# Altium PCB urbanturbine_rev5a.PcbDoc
Units mil, origin at the board's own origin, x right, y up, seen from the top; angles counter-clockwise.
Board outline 3150 x 4000 mil, 2 copper layers (Top Layer, Bottom Layer); 55 components, 50 nets, 221 pads, 17 vias.
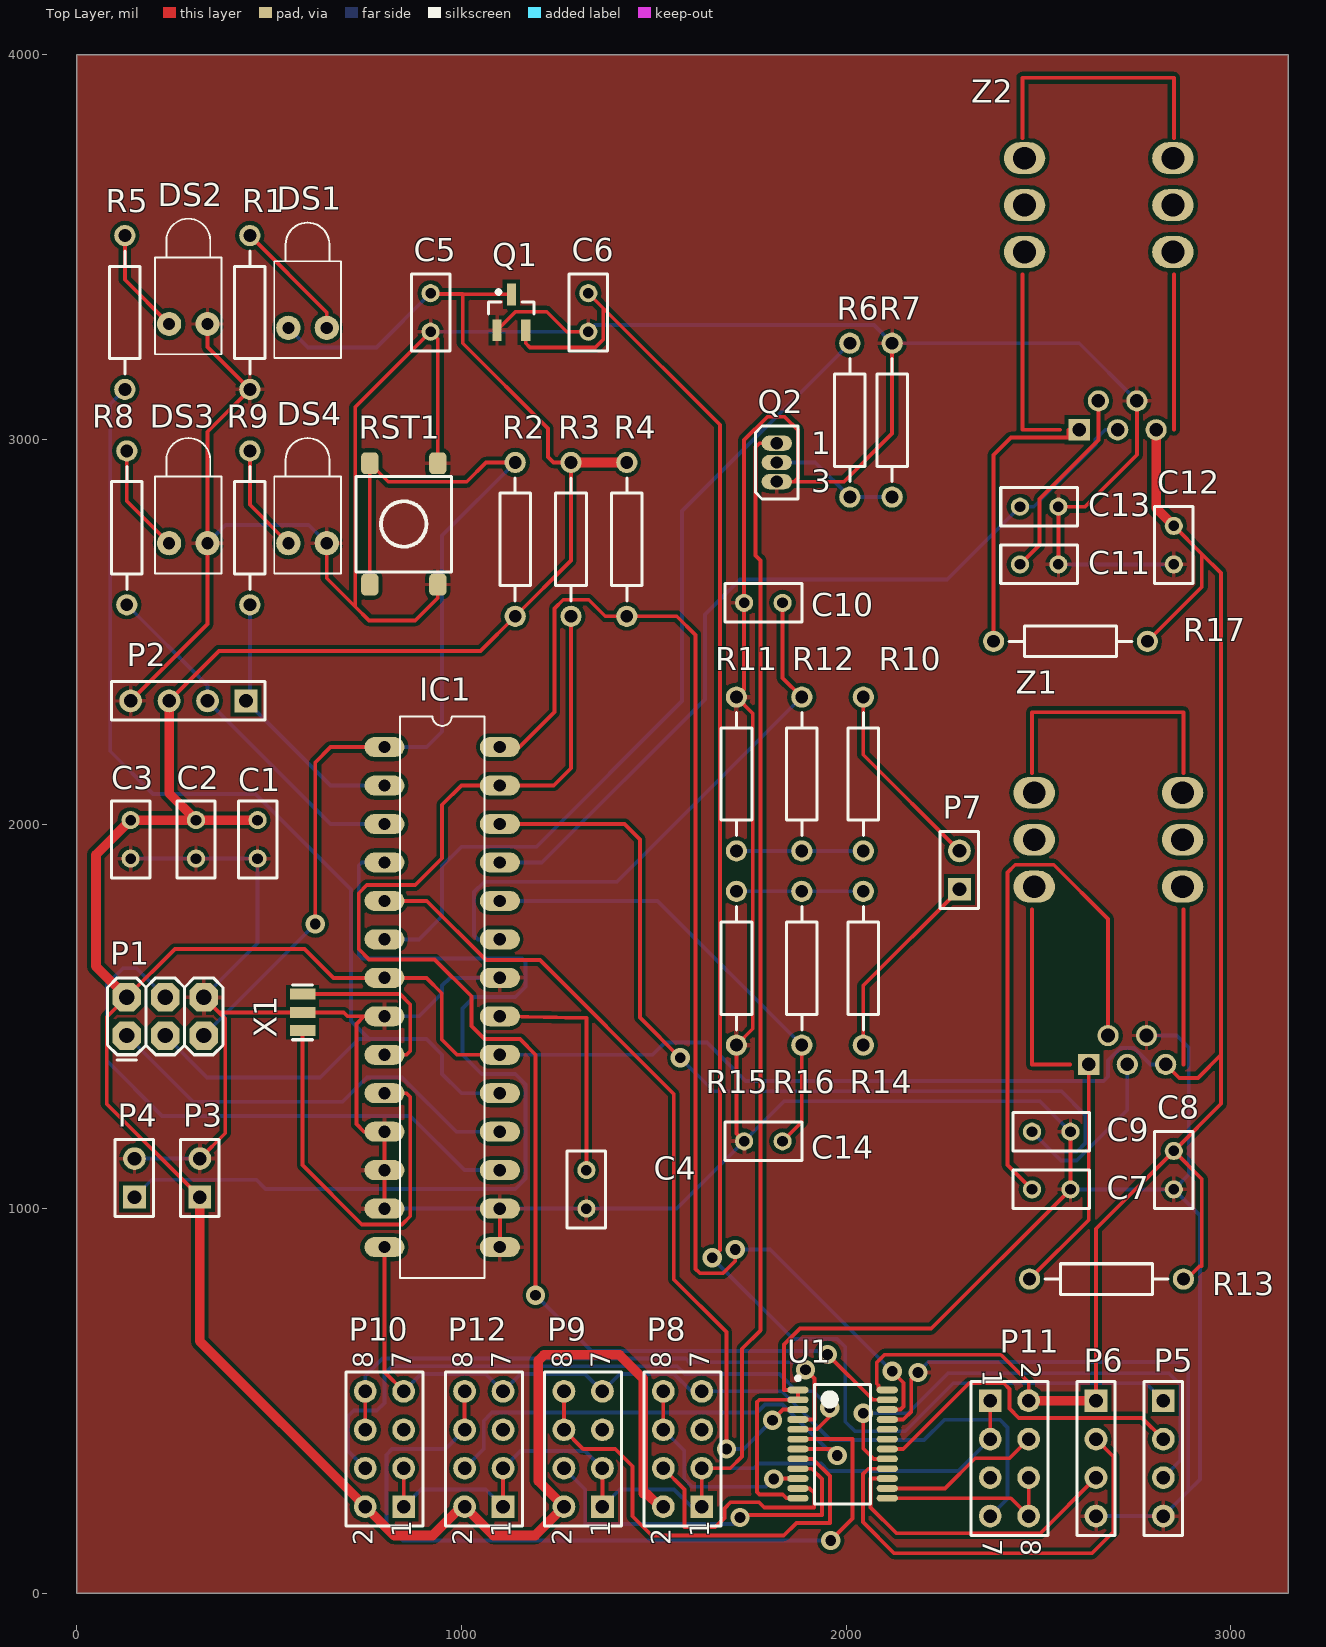
[diagram p0: Top Layer view]
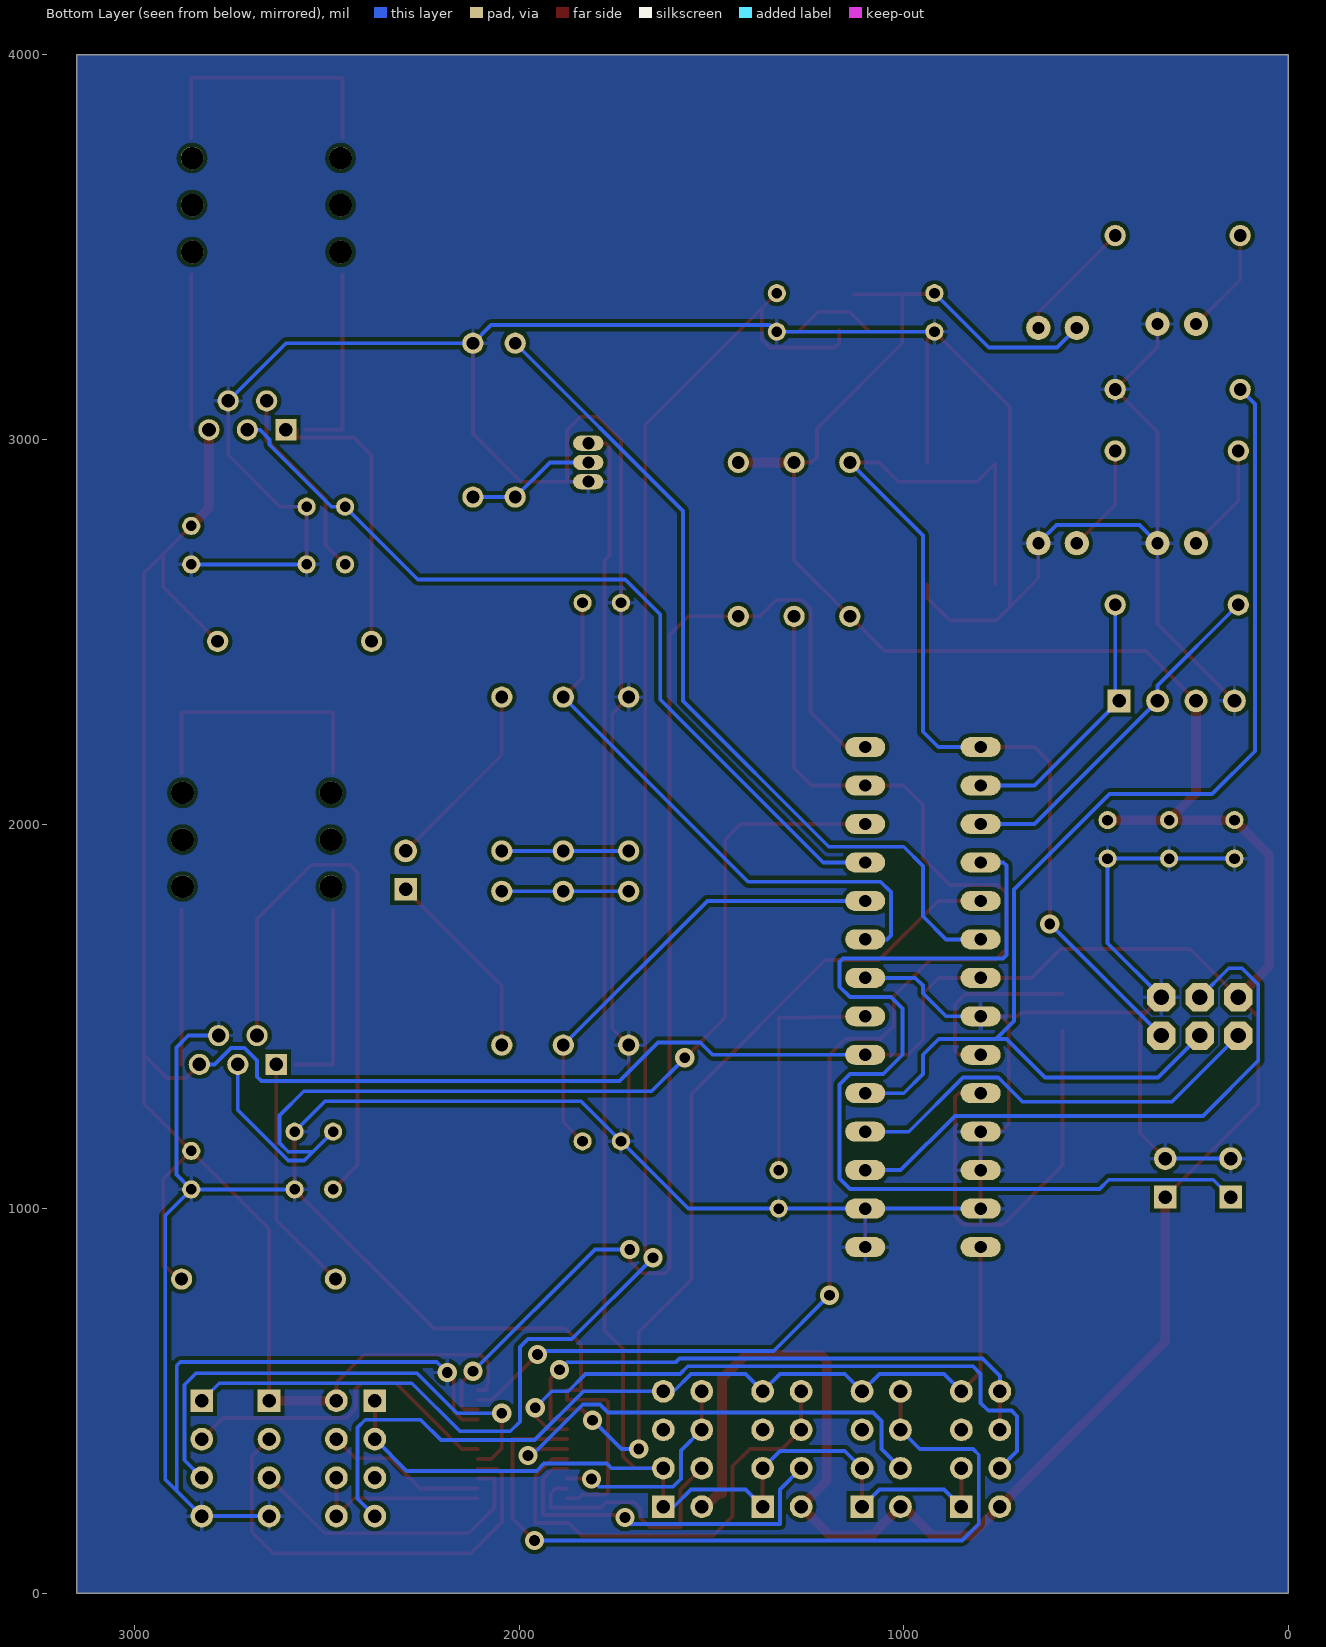
[diagram p1: Bottom Layer view, seen from below]

## Layer stack, top to bottom
Top Solder: solder mask 0.4, Solder Resist, Dk 3.5
Top Layer: signal copper 1.4
Dielectric 1: dielectric 12.6, FR-4, Dk 4.8
Bottom Layer: signal copper 1.4
Bottom Solder: solder mask 0.4, Solder Resist, Dk 3.5

## Board outline
0,0 0,4000 3150,4000 3150,0

## Design rules (kind name [scope] priority, off if disabled: settings)
Clearance [All] p1: gap=10 except(1: SMDPad-SMDPad)
PolygonConnect [All] p1: connectstyle=Relief reliefconductorwidth=10 reliefentries=4 polygonreliefangle="90 Angle" airgapwidth=10
RoutingVias [All] p1: holewidth=28 width=50 viastyle="Through Hole" minholewidth=28 minwidth=50 maxholewidth=28 maxwidth=50
SolderMaskExpansion [All] p1: expansion=4
Width [All] p1: maxlimit=25 minlimit=10 preferedwidth=10 minimp=50.000000 maximp=50.000000 favimp=50.000000
30 further rules are at their usual default settings.

## Classes and differential pairs
component class displays: P8 P9 P10 P11 P12
component class sensors: C7 C8 C9 C10 C11 C12 C13 C14 P7 R10 R11 R12 R13 R14 R15 R16 R17 Z1 Z2
component class urbanturbine: C1 C2 C3 C4 C5 C6 DS1 DS2 DS3 DS4 IC1 P1 P2 P3 P4 P5 P6 Q1 Q2 R1 R2 R3 R4 R5 R6 R7 R8 R9 RST1 U1 X1

## Components (designator, comment, footprint, x,y, rotation, side; value= is the part's Value field where it differs from the comment)
C1 "Cap Pol1" RAD-0.1 470,1960 r270 top
C2 "Cap Pol1" RAD-0.1 310,1960 r270 top
C3 "Cap Pol1" RAD-0.1 140,1960 r270 top
C4 "C1005X7R1H104K050BB" RAD-0.1 1325,1050 r270 top
C5 "Cap" RAD-0.1 920,3330 r90 top
C6 "Cap" RAD-0.1 1330,3330 r90 top
C7 "Cap" RAD-0.1 2533.66,1050 r0 top
C8 "Cap" RAD-0.1 2852.36,1100 r90 top
C9 "Cap" RAD-0.1 2533.66,1200 r0 top
C10 "Cap" RAD-0.1 1785,2575 r0 top
C11 "Cap" RAD-0.1 2502.36,2675 r0 top
C12 "Cap" RAD-0.1 2852.36,2725 r90 top
C13 "Cap" RAD-0.1 2502.36,2825 r0 top
C14 "Cap" RAD-0.1 1785,1175 r0 top
DS1 "LTST-C191KGKT" LED-1 600,3290 r90 top
DS2 "LTST-C191KRKT" LED-1 290,3300 r90 top
DS3 "LTST-C191KRKT" LED-1 290,2730 r90 top
DS4 "LTST-C191KRKT" LED-1 600,2730 r90 top
IC1 "ATMEGA328-PU" *DIL28 950,1550 r0 top
P1 "M20-9980346" 2X3 130,1450 r0 top
P2 "Header 4" HDR1X4 440,2320 r180 top
P3 "" HDR1X2 320,1030 r90 top
P4 "" HDR1X2 150,1030 r90 top
P5 "" HDR1X4 2825,500.59 r270 top
P6 "" HDR1X4 2650,500.59 r270 top
P7 "" HDR1X2 2295,1830 r90 top
P8 "" HDR2X4 1625,225 r90 top
P9 "SPEED_DISP" HDR2X4 1366.67,225 r90 top
P10 "TEMP_DISP" HDR2X4 850,225 r90 top
P11 "CRANK_DISP" HDR2X4 2375,500.59 r270 top
P12 "HUMIDITY_DISP" HDR2X4 1108.33,225 r90 top
Q1 "AP2138N-3.3TRG1" SOT23_M 1130,3330 r90 top
Q2 "MOSFET-N" E3 1820,2940 r0 top
R1 "RC0603JR-071KL" AXIAL-0.4 450,3330 r270 top
R2 "Res1" AXIAL-0.4 1140,2740 r90 top
R3 "Res2" AXIAL-0.4 1285,2740 r90 top
R4 "Res2" AXIAL-0.4 1430,2740 r90 top
R5 "Res1" AXIAL-0.4 125,3330 r90 top
R6 "ERJ-3EKF1002V" AXIAL-0.4 2010,3050 r90 top
R7 "Res2" AXIAL-0.4 2120,3050 r90 top
R8 "Res1" AXIAL-0.4 130,2770 r90 top
R9 "Res1" AXIAL-0.4 450,2770 r90 top
R10 "Res2" AXIAL-0.4 2045,2130 r90 top
R11 "Res2" AXIAL-0.4 1715,2130 r90 top
R12 "Res2" AXIAL-0.4 1885,2130 r270 top
R13 "Res2" AXIAL-0.4 2677.36,816.61 r0 top
R14 "Res2" AXIAL-0.4 2045,1625 r270 top
R15 "Res2" AXIAL-0.4 1715,1625 r270 top
R16 "Res2" AXIAL-0.4 1885,1625 r90 top
R17 "Res2" AXIAL-0.4 2583.66,2475 r0 top
RST1 "PTS645SH50SMTR92 LFS" "TACTILE SWITCH SMD" 850,2780 r90 top
U1 "TCA9548A" TCA9548A 1991.14,387.8 r0 top
X1 "16MHz" RESONATOR-SMD 587.49,1510.38 r90 top
Z1 "LEM HO-25P" HO-25 2582.09,1375 r90 top
Z2 "LEM HO-6P" HO-25 2557.09,3025 r90 top

## Footprints (in the part's own frame and the unit in brackets; to place one, negate y for a bottom-side part, rotate by r counter-clockwise, add the part's x,y. Pads: shape width x height; smd on the part's side, far side on the other; paste and mask are expansions set on the pad)
2X3 [mil] "2X3"
  oct 74x74 hole 40: 1(0,0) 2(0,100) 3(100,0) 4(100,100) 5(200,0) 6(200,100)
  silkscreen extent -50,-63 250,150, body extent -50,-49 250,149, height 335
*DIL28 [mil]
  oval 104x52 hole 32: 1(-150,650) 2(-150,550) 3(-150,450) 4(-150,350) 5(-150,250) 6(-150,150) 7(-150,50) 8(-150,-50) 9(-150,-150) 10(-150,-250) 11(-150,-350) 12(-150,-450) 13(-150,-550) 14(-150,-650) 15(150,-650) 16(150,-550) 17(150,-450) 18(150,-350) 19(150,-250) 20(150,-150) 21(150,-50) 22(150,50) 23(150,150) 24(150,250) 25(150,350) 26(150,450) 27(150,550) 28(150,650)
  silkscreen extent -110,-730 110,730, body extent -315,-730 110,730, height 314
AXIAL-0.4 [mm] "Axial Device, Thru-Hole; 2 Leads; 0.4 in Pin Spacing"
  round 1.4 hole 0.85: 1(-5.08,0) 2(5.08,0)
  silkscreen extent -4.06,-1.02 4.06,1.02
E3 [mm] "TO, Flat Index; 3 In-Line, Axial Leads; Body Dia. 4.6mm; Lead Dia. 0.5 mm (max)"
  oval 2x1 hole 0.8: 1(0,1.27) 2(0,0) 3(0,-1.27)
  silkscreen extent -1.41,-2.41 1.41,2.41
HDR1X2 [mm] "Connector; Header; 2 Position"
  rect 1.5x1.5 hole 0.9: 1(0,0)
  round 1.5 hole 0.9: 2(2.54,0)
  silkscreen extent -1.27,-1.27 3.81,1.27
HDR1X4 [mm] "Connector; Header; 4 Position"
  rect 1.5x1.5 hole 0.9: 1(0,0)
  round 1.5 hole 0.9: 2(2.54,0) 3(5.08,0) 4(7.62,0)
  silkscreen extent -1.27,-1.27 8.89,1.27
HDR2X4 [mm] "Connector; Header; 4x2 Position"
  rect 1.5x1.5 hole 0.9: 1(0,0)
  round 1.5 hole 0.9: 2(0,2.54) 3(2.54,0) 4(2.54,2.54) 5(5.08,0) 6(5.08,2.54) 7(7.62,0) 8(7.62,2.54)
  silkscreen extent -1.27,-1.27 8.89,3.81
HO-25 [mm]
  round 1.4 / inner oval 2.5x1.4 / far side round 1.4 hole 0.9: 1(0,-6.33) 2(1.905,-5.06) 3(0,-3.79) 4(1.905,-2.52)
  rect 1.4x1.4 / inner rect 2.5x1.4 / far side rect 1.4x1.4 hole 0.9: 5(0,-1.25)
  oval 2.1x2.74 / inner round 1.5 / far side round 1.5 hole 1.5: ""(11.74,-7.44) ""(11.74,2.36) ""(14.84,-7.44) ""(14.84,2.36) ""(17.94,-7.44) ""(17.94,2.36)
  Top Layer lines w0.254: 10.25,2.5 0,2.5 0,0 ; 19.25,2.5 23.25,2.5 23.25,-7.5 19.25,-7.5 ; 0,-7.5 10.25,-7.5
  body extent -0.22,-8.5 23.72,3.5, height 20.8
LED-1 [mm] "LED; 2 Leads"
  round 1.6 hole 0.8: 1(0,1.27) 2(0,-1.27)
  silkscreen extent -2,-2.2 6.95,2.2
RAD-0.1 [mm] "Radial Cap, Thru-Hole; 2 Leads; 0.1 in Pin Spacing"
  round 1.2 hole 0.7: 1(-1.27,0) 2(1.27,0)
  silkscreen extent -2.54,-1.27 2.54,1.27
RESONATOR-SMD [mil] "RESONATOR-SMD"
  rect 28x67 smd: 1(-47.62,0) 2(-0.38,0) 3(47.62,0)
  silkscreen extent -71,-26 71,26
SOT23_M [mm] "SOT23, 3-Leads, Body 2.9x1.3mm, Pitch 0.95mm, Lead Span 2.3mm - Reverse Pinning, IPC Low Density"
  rect 1.45x0.6 smd: 1(1.175,0) 2(-1.175,-0.95) 3(-1.175,0.95)
  silkscreen extent -0.1,-1.5 1.47,1.5, body extent -0.7,-1.5 0.7,1.5, height 1.1
"TACTILE SWITCH SMD" [mil] "Switch, Through-Hole, 4 Leads, Body 8.5x8.5mm, Row Spacing 9.0mm, Pitch 4.5mm"
  rrect50% 57x45 smd: 1(157.87,-88.58) 2(-157.48,-88.58) 3(157.87,88.19) 4(-157.48,88.19)
  silkscreen extent -124,-124 124,124, body extent -177,-122 177,122, height 177
TCA9548A [mm] "TSOP, 24-Leads, Body 7.80x4.40mm, Pitch 0.65mm, IPC Medium Density"
  oval 1.4x0.45 smd: 1(-2.95,3.575) 2(-2.95,2.925) 3(-2.95,2.275) 4(-2.95,1.625) 5(-2.95,0.975) 6(-2.95,0.325) 7(-2.95,-0.325) 8(-2.95,-0.975) 9(-2.95,-1.625) 10(-2.95,-2.275) 11(-2.95,-2.925) 12(-2.95,-3.575) 13(2.95,-3.575) 14(2.95,-2.925) 15(2.95,-2.275) 16(2.95,-1.625) 17(2.95,-0.975) 18(2.95,-0.325) 19(2.95,0.325) 20(2.95,0.975) 21(2.95,1.625) 22(2.95,2.275) 23(2.95,2.925) 24(2.95,3.575)
  silkscreen extent -3.07,-3.95 1.85,4.47, body extent -3.27,-3.96 3.28,3.93, height 1.2

## Part data
C1 C2 C3 C4: library part Cap, "Capacitor"
C5 C6 C7 C8 C9 C10 C11 C12 C13 C14: "Capacitor"
DS1 DS2 DS3 DS4: library part LED1, "Typical RED GaAs LED"
IC1: "IC MCU 8BIT 32KB FLASH 28DIP"
P1: "DIL VERTICAL PC TAIL PIN HEADER"
P2: "Header, 4-Pin"
P3 P4 P7: library part "Header 2", "Header, 2-Pin"
P5 P6: library part "Header 4", "Header, 4-Pin"
P8 P9 P10 P11 P12: library part "Header 4X2", "Header, 4-Pin, Dual row"
Q1: "IC REG LINEAR 3.3V 250MA SOT23-3"
Q2: "N-Channel MOSFET"
R1 R2 R5 R6 R8 R9: library part Res2, "Resistor"
R3 R4 R7 R10 R11 R12 R13 R14 R15 R16 R17: "Resistor"
RST1: "SWITCH TACTILE SPST-NO 0.05A 12V"
U1: "IIC multiplexor"
X1: library part CSTNE16M0VH3C000R0, "CER RESONATOR 16MHZ SMD"
Z1: "Hall Effect Current Sensor"
Z2: library part "LEM HO-25P", "Hall Effect Current Sensor"

## Via types
v1: diameter 50, hole 28, Top Layer to Bottom Layer, 17 vias

## Nets (pads, with @x,y where several pads share a name; then routed paths per layer and width w, separated by ;. In a path a pad name is that pad's centre, name@x,y a point inside that pad or via, vN(x,y) a via of type N, cw(c..) or ccw(c..) an arc to the next point about the centre after c; other vN are vias at no path point)
3.3V: C6.2 P5.1 Q1.2 | length 4531.6
  Top Layer w10: Q1.2 1167.4,3250 1178.4,3239 1348,3239 1369,3260 1369,3341 ; C6.2 1369,3341 ; v1(1652,872) 1672,892 1672,3038 1369,3341
  Bottom Layer w10: v1(1652,872) 1863,661 1977,661 1998,640 1998,446 2023,421 2154,421 2279,546 2779.59,546 P5.1
+5: C1.1 C2.1 C3.1 C5.2 C8.2 C12.2 DS1.1 IC1.7 IC1.20 P1.2 P2.3 P3.1 P6.1 P8.2 P9.2 P10.2 P11.2 P12.2 Q1.1 R2.1 R3.2 R4.2 R13.2 R17.2 U1.24 Z1.1 Z2.1 | length 14804
  Top Layer w10: P2.3 370,2450 1050,2450 R2.1 1285,2685 R3.2 1239.64,2940 1225,2954.64 1225,3028.58 1003.58,3250 1003.58,3378.13 ; P3.1 78,1272 78,1498 P1.2 255,1675 592.5,1675 667.5,1600 IC1.7 909,1600 949,1560 949,1440 989,1400 IC1.20 ; C5.2 921.87,3378.13 1003.58,3378.13 ; Q1.1 1130,3377.44 1061.02,3377.44 1003.58,3378.13 ; U1.24 2084.73,528.54 2084.73,539.94 2080,544.67 2080,599.9 2100,619.9 2403.1,619.9 2475,548 P11.2 ; P6.1 2650,947.64 C8.2 ; R17.2 2925,2616.34 2925,2702.36 ; Z1.1 2866.3,1340 2915,1340 2975,1400 ; C12.2 2925,2702.36 ; R13.2 2877.36,808.46 2918.9,850 2925,850 2925,1077.36 C8.2 ; C8.2 2975,1272.64 2975,1400 ; 2925,2702.36 2975,2652.36 2975,1400
  Top Layer w25: P1.2 50,1630 50,1920 C3.1 C2.1 ; P2.3 240,2080 C2.1 ; P3.1 320,655 P10.2 825,150 925,150 1000,225 P12.2 1083.33,150 1191.67,150 P9.2 1200,291.67 1200,605.26 1214.64,619.9 1411.1,619.9 1472.5,558.5 1472.5,259.12 1481.66,259.12 1515.78,225 P8.2 ; C1.1 C2.1 ; R3.2 R4.2 ; P11.2 P6.1 ; Z2.1 2806.3,2821.06 C12.2
  Bottom Layer w10: DS1.1 601,3239 779,3239 C5.2 ; IC1.20 1496.88,1400 1529,1432.12 1638.69,1432.12 1738.81,1332 2670,1332 2681,1343 2681,1384.89 2713.67,1417.56 2748.93,1417.56 2791.49,1375 Z1.1
BME_C: P6.2 U1.16 | length 1161.6
  Top Layer w10: U1.16 2057.82,323.82 2044,310 2044,185 2125,104 2640,104 2695,159 2695,355.59 P6.2
BME_D: P6.3 U1.15 | length 792.2
  Top Layer w10: U1.15 2064,298.23 2064,223 2131,156 2505.41,156 P6.3
COMP_IN: IC1.4 P4.1 | length 2614
  Bottom Layer w10: P4.1 195,1075 467,1075 491,1051 1140,1051 1167,1078 1167,1323 1140,1350 1053,1350 1003,1400 1003,1520 1033,1550 1140,1550 1167,1577 1167,1641 1158,1650 742,1650 733,1659 733,1892 741,1900 IC1.4
CRANK_C: P11.4 U1.14 | length 420.7
  Top Layer w10: U1.14 2257.64,272.64 2336,351 2425.41,351 P11.4
CRANK_CURRENT: C13.1 IC1.25 Z2.3 | length 2210
  Bottom Layer w10: IC1.25 1209,1900 1633,2324 1633,2545 1724,2636 2263.36,2636 C13.1 2488,2825 2649,2986 2649,3000 2674,3025 Z2.3
CRANK_D: P11.6 P11.8 U1.13 | length 487
  Top Layer w10: U1.13 2428.54,247.05 P11.8 P11.6
CRANK_IN_+: P7.2 R10.2 | length 503.6
  Top Layer w10: R10.2 2045,2180 P7.2
CRANK_VOLTAGE: C10.2 IC1.23 R12.1 | length 1511.9
  Top Layer w10: C10.2 1835,2380 R12.1
  Bottom Layer w10: IC1.23 1043,1700 1033,1710 1033,1823 1060,1850 1405,1850 R12.1
DISPLAY_GND: P8.1 P8.3 P9.1 P9.3 P10.1 P10.3 P11.1 P11.3 P12.1 P12.3 Q2.1 | length 5009.7
  Top Layer w10: P10.1 P10.3 ; P12.1 P12.3 ; P9.1 P9.3 ; P8.1 P8.3 1698.91,325 1729.53,355.62 1729.53,635.53 1777.56,683.56 1777.56,2685.44 1765,2698 1765,2980 1775,2990 Q2.1 ; P11.3 P11.1
  Bottom Layer w10: P10.1 895,270 1063.33,270 P12.1 ; P12.3 1153.33,370 1321.67,370 P9.3 ; P9.1 1411.67,270 1553,270 1598,225 P8.1 ; P8.3 1760,325 1772,337 1935,337 1954,318 2292.41,318 P11.3
DISPLAY_RES: IC1.14 P8.7 P9.7 P10.7 P11.7 P12.7 | length 2409.4
  Top Layer w10: IC1.14 800,575 P10.7
  Bottom Layer w10: P10.7 895,570 1063.33,570 P12.7 1153.33,570 1321.67,570 P9.7 1411.67,570 1553,570 1598,525 P8.7 1832.97,525 1959.97,398 2203,398 2256,451 2400,451 2420,431 2420,245.59 P11.7
DISPLAY_TOGGLE: IC1.6 R6.2 | length 2218.1
  Bottom Layer w10: IC1.6 890,1700 950,1760 950,1891 1000,1941 1195,1941 1574,2320 1574,2814 R6.2
GND: C1.2 C2.2 C3.2 C4.2 C5.1 C6.1 C7.2 C8.1 C9.2 C10.1 C11.2 C12.1 C13.2 C14.1 DS2.2 DS3.2 DS4.2 IC1.8 IC1.11 IC1.12 IC1.13 IC1.15 IC1.16 IC1.22 P1.6 P2.4 P3.2 P4.2 P5.4 P6.4 Q1.3 Q2.3 R1.2 R7.2 R11.2 R15.2 RST1.1 RST1.2 U1.1 U1.2 U1.12 U1.21 X1.2 Z1.2 Z2.2 | length 18532.9
  Top Layer w10: P2.4 340,2520 DS3.2 340,3020 R1.2 340,3240 DS2.2 ; P3.2 386,1196 386,1494 370,1510 ; P1.6 370,1510 ; DS4.2 650,2639 724,2565 ; IC1.13 IC1.12 IC1.11 747,1200 727,1220 727,1480 747,1500 ; IC1.8 747,1500 ; RST1.2 938.58,2587.58 880,2529 760,2529 724,2565 ; RST1.1 938.58,3261.42 C5.1 724,3084 724,2565 ; Q1.3 1140.86,3332 1222,3332 1274,3280 C6.1 ; IC1.15 IC1.16 ; C14.1 1715,1195 R15.2 1757.56,1467.56 1757.56,2287.44 R11.2 1735,2350 C10.1 1735,2998 1796,3059 1840,3059 1875,3024 1875,2900 1865,2890 ; Q2.3 1865,2890 ; U1.12 1844.95,247.05 1835.38,256.62 1775.38,256.62 1768.69,263.31 1768.69,497 1774.64,502.95 U1.2 U1.1 1838.91,528.54 1838.91,646.82 1880,687.91 2221.57,687.91 C7.2 C9.2 ; U1.21 2148.77,451.77 2169.84,472.84 2169.84,556.84 v1(2187,574) ; R7.2 2120,3015 1995,2890 1865,2890 ; C11.2 C13.2 2621.3,2825 2756.3,2960 Z2.2 ; 370,1510 X1.2 694,1510 704,1500 747,1500
  Bottom Layer w10: C3.2 C2.2 C1.2 470,1690 P1.6 ; P4.2 P3.2 ; DS3.2 387,2777 603,2777 DS4.2 ; IC1.13 IC1.16 C4.2 1560,1000 C14.1 1839,1279 2504.66,1279 C9.2 ; IC1.8 890,1500 950,1560 950,1580 970,1600 IC1.22 ; C5.1 C6.1 1347,3297 2073,3297 R7.2 2606.3,3250 Z2.2 ; v1(2187,574) 2214,601 2881,601 2890,592 2890,265.59 ; C11.2 C12.1 ; C7.2 C8.1 ; P6.4 P5.4 2890,265.59 ; Z1.2 2860,1450 2891,1419 2891,1088.64 C8.1 ; C8.1 2920,982.36 2920,295.59 2890,265.59
HUMIDITY_C: P12.4 U1.7 | length 1244.2
  Top Layer w10: U1.7 1960,375 v1(1977,358)
  Bottom Layer w10: P12.4 1058,374.67 1058,448 1080,470 1768.69,470 1789.3,490.61 1834.61,490.61 1967.22,358 v1(1977,358)
HUMIDITY_D: P12.6 P12.8 U1.6 | length 2112.3
  Top Layer w10: P12.6 P12.8 ; U1.6 2017,400.56 2017,193.93 v1(1960.07,137)
  Bottom Layer w10: P12.6 958.33,375 820,375 805,360 805,180 848,137 v1(1960.07,137)
MISO: IC1.18 P1.1 | length 1125.7
  Bottom Layer w10: P1.1 302,1278 691,1278 754,1341 846,1341 987,1200 IC1.18
MOSI: IC1.17 P1.4 | length 1538.5
  Bottom Layer w10: P1.4 155,1625 120,1625 78,1583 78,1385 222,1241 867,1241 1008,1100 IC1.17
MUX_RST: IC1.5 U1.3 | length 2168.1
  Top Layer w10: IC1.5 910,1800 1064,1646 1203.99,1646 1552,1297.99 1552,816 1689,679 v1(1689,375) ; v1(1809,450) 1836.36,477.36 U1.3
  Bottom Layer w10: v1(1689,375) 1734,375 v1(1809,450)
NetC4_1: C4.1 IC1.21 | length 621
  Top Layer w10: IC1.21 1325,1496 C4.1
NetC7_1: C7.1 Z1.4 | length 1481.2
  Top Layer w10: C7.1 2420,1113.66 2420,1874 2440,1894 2540,1894 2681.3,1752.7 Z1.4
NetC11_1: C11.1 Z2.4 | length 509.5
  Top Layer w10: C11.1 2503,2725.64 2503,2845 2656.3,2998.3 Z2.4
NetDS1_2: DS1.2 R1.1 | length 322.8
  Top Layer w10: R1.1 650,3330 DS1.2
NetDS2_1: DS2.1 R5.2 | length 277.6
  Top Layer w10: R5.2 125,3415 DS2.1
NetDS3_1: DS3.1 R8.2 | length 285.6
  Top Layer w10: R8.2 130,2840 DS3.1
NetDS4_1: DS4.1 R9.2 | length 281.4
  Top Layer w10: R9.2 450,2830 DS4.1
NetIC1_9: IC1.9 X1.3 | length 482.8
  Top Layer w10: X1.3 840,1558 867,1531 867,1410 857,1400 IC1.9
NetIC1_10: IC1.10 X1.1 | length 1083.9
  Top Layer w10: X1.1 587,1462.76 587,1113 741,959 846,959 867,980 867,1290 857,1300 IC1.10
NetQ2_2: Q2.2 R6.1 R7.1 | length 337.3
  Bottom Layer w10: Q2.2 1920,2940 R6.1 R7.1
NetR10_1: R10.1 R11.1 R12.2 | length 330
  Bottom Layer w10: R11.1 R12.2 R10.1
NetR13_1: R13.1 Z1.5 | length 622.1
  Top Layer w10: R13.1 2631.3,970.55 Z1.5
NetR14_1: R14.1 R15.1 R16.2 | length 330
  Bottom Layer w10: R15.1 R16.2 R14.1
NetR17_1: R17.1 Z2.5 | length 746.1
  Top Layer w10: R17.1 2383.66,2959.66 2429,3005 2578,3005 2578,3025 Z2.5
PROX_C: P5.2 U1.18 | length 878.7
  Top Layer w10: U1.18 2149,375 2320,546 2410,546 2425,531 2425,480 2449,456 2769.59,456 P5.2
PROX_D: P5.3 U1.17 | length 1305.5
  Top Layer w10: v1(2045,468) 2045,376.59 2072.18,349.41 U1.17
  Bottom Layer w10: v1(2045,468) 2161,468 2265,572 2840,572 2870,542 2870,345.59 P5.3
RST: IC1.1 P1.5 R2.2 RST1.3 RST1.4 | length 2706
  Top Layer w10: v1(620,1740) 620,2160 660,2200 IC1.1 ; RST1.4 RST1.3 809.69,2890 1014,2890 1064,2940 R2.2
  Bottom Layer w10: P1.5 v1(620,1740) ; IC1.1 910,2200 950,2240 950,2750 R2.2
Rx: IC1.2 P2.1 R9.1 | length 705.3
  Bottom Layer w10: R9.1 450,2330 P2.1 660,2100 IC1.2
SCK: IC1.19 P1.3 R5.1 | length 3184.2
  Bottom Layer w10: R5.1 87,3092 87,2189 198,2078 465,2078 713,1830 713,1488 760,1441 ; P1.3 339,1341 633,1341 733,1441 760,1441 ; IC1.19 1000,1300 950,1350 950,1400 909,1441 760,1441
SCL: IC1.28 R4.1 U1.22 | length 3351.4
  Top Layer w10: IC1.28 1151,2200 1242,2291 1242,2560 1265,2583 1331,2583 1374,2540 R4.1 1560,2540 1609,2491 1609,843 1620,832 1680,832 1712,864 v1(1712,894) ; U1.22 2142,477.36 2149.84,485.21 2149.84,547.16 v1(2120,577)
  Bottom Layer w10: v1(1712,894) 1803,894 v1(2120,577)
SDA: IC1.27 R3.1 U1.23 | length 3579
  Top Layer w10: v1(1193,775) 1193,1400 1152,1441 1060,1441 1026,1475 1026,1552 930,1648 760,1648 733,1675 733,1820 754,1841 880,1841 950,1911 950,2050 1000,2100 IC1.27 1240,2100 1285,2145 R3.1 ; v1(1952,621) 2070.05,502.95 U1.23
  Bottom Layer w10: v1(1193,775) 1338,630 1943,630 v1(1952,621)
SPEED_C: P9.4 U1.9 | length 960.7
  Top Layer w10: v1(1724.62,196.62) 1731.19,203.19 1937.56,203.19 1937.56,297.26 1911,323.82 U1.9
  Bottom Layer w10: P9.4 1322,269.67 1322,180 1708,180 v1(1724.62,196.62)
SPEED_D: P9.6 P9.8 U1.8 | length 1218.5
  Top Layer w10: P9.8 P9.6 1316.67,375 1400,375 1445,330 1445,200 1495,150 1838,150 1871,183 1958,183 1958,305.1 1913.69,349.41 U1.8
TEMP_C: P10.4 U1.5 | length 1668.2
  Top Layer w10: U1.5 1924.18,426.18 1958,460 v1(1958,482)
  Bottom Layer w10: P10.4 705,370 705,460 720,475 780,475 800,495 800,570 820,590 1561.29,590 1581.29,570 1827,570 1872,525 1915,525 v1(1958,482)
TEMP_D: P10.6 P10.8 U1.4 | length 1497.4
  Top Layer w10: P10.6 P10.8 ; U1.4 1918,451.77 1918,558 v1(1895,581)
  Bottom Layer w10: P10.8 750,564.97 795.03,610 1583.37,610 1593,600.37 1875.63,600.37 v1(1895,581)
TURBINE_C: P8.4 U1.11 | length 644.7
  Top Layer w10: P8.4 1580,270 1580,172 1660,172 1684,196 1684,220.62 1700,236.62 1774,236.62 1787.43,223.19 1917.56,223.19 1917.56,260 1904.92,272.64 U1.11
TURBINE_CURRENT: C9.1 IC1.26 Z1.3 | length 2727.8
  Top Layer w10: IC1.26 1424,2000 1464,1960 1464,1497 v1(1569,1392)
  Bottom Layer w10: v1(1569,1392) 1656,1305 2560,1305 2623,1242 2623,1171 2600,1148 2535.66,1148 ; C9.1 2535.66,1148 ; Z1.3 2731.3,1256.3 2600,1125 2558.66,1125 2535.66,1148
TURBINE_D: P8.6 P8.8 U1.10 | length 562.9
  Top Layer w10: P8.6 P8.8 ; v1(1812,297) 1813.23,298.23 U1.10
  Bottom Layer w10: P8.6 1579.29,370.71 1579.29,297.71 1600,277 1792,277 v1(1812,297)
TURBINE_IN_+: P7.1 R14.2 | length 508.6
  Top Layer w10: R14.2 2045,1580 P7.1
TURBINE_VOLTAGE: C14.2 IC1.24 R16.1 | length 1211
  Top Layer w10: C14.2 1885,1225 R16.1
  Bottom Layer w10: IC1.24 1510,1800 R16.1
Tx: IC1.3 P2.2 R8.1 | length 929.5
  Bottom Layer w10: R8.1 340,2360 P2.2 660,2000 IC1.3
pads on no net: P8.5 P9.5 P10.5 P11.5 P12.5 U1.19 U1.20 Z1. Z2.

## Polygon pours and split planes (outlines as drawn)
GND on Top Layer "Top Layer-No Net" (solid, remove dead copper, pour order 0): 0,0 0,4000 3150,4000 3150,0
GND on Bottom Layer "Top Layer-No Net1" (solid, remove dead copper, pour order 1): 0,0 0,4000 3150,4000 3150,0

## Silkscreen, mask and mechanical layers (free items; w line width, h text height)
Mechanical 1:
  the board outline again, w10

## Text inside footprints (layer, text, board x,y; h text height)
P8: Top Overlay "8" at 1545,585 h50 r90; Top Overlay "7" at 1645,585 h50 r90; Top Overlay "1" at 1645,145 h50 r90; Top Overlay "2" at 1545,125 h50 r90
P9: Top Overlay "8" at 1286.67,585 h50 r90; Top Overlay "7" at 1386.67,585 h50 r90; Top Overlay "1" at 1386.67,145 h50 r90; Top Overlay "2" at 1286.67,125 h50 r90
P10: Top Overlay "8" at 770,585 h50 r90; Top Overlay "7" at 870,585 h50 r90; Top Overlay "1" at 870,145 h50 r90; Top Overlay "2" at 770,125 h50 r90
P11: Top Overlay "8" at 2455,140.59 h50 r270; Top Overlay "7" at 2355,140.59 h50 r270; Top Overlay "1" at 2355,580.59 h50 r270; Top Overlay "2" at 2455,600.59 h50 r270
P12: Top Overlay "8" at 1028.33,585 h50 r90; Top Overlay "7" at 1128.33,585 h50 r90; Top Overlay "1" at 1128.33,145 h50 r90; Top Overlay "2" at 1028.33,125 h50 r90
Q2: Top Overlay "3" at 1909.57,2862.72 h59.05; Top Overlay "1" at 1909.57,2961.85 h59.05